# Altium PCB Design_Project.PcbDoc
Units mm, origin at the board's own origin, x right, y up, seen from the top; angles counter-clockwise.
Board outline 63.25 x 69.09 mm, 2 copper layers (Top Layer, Bottom Layer); 24 components, 25 nets, 124 pads, 5 vias.
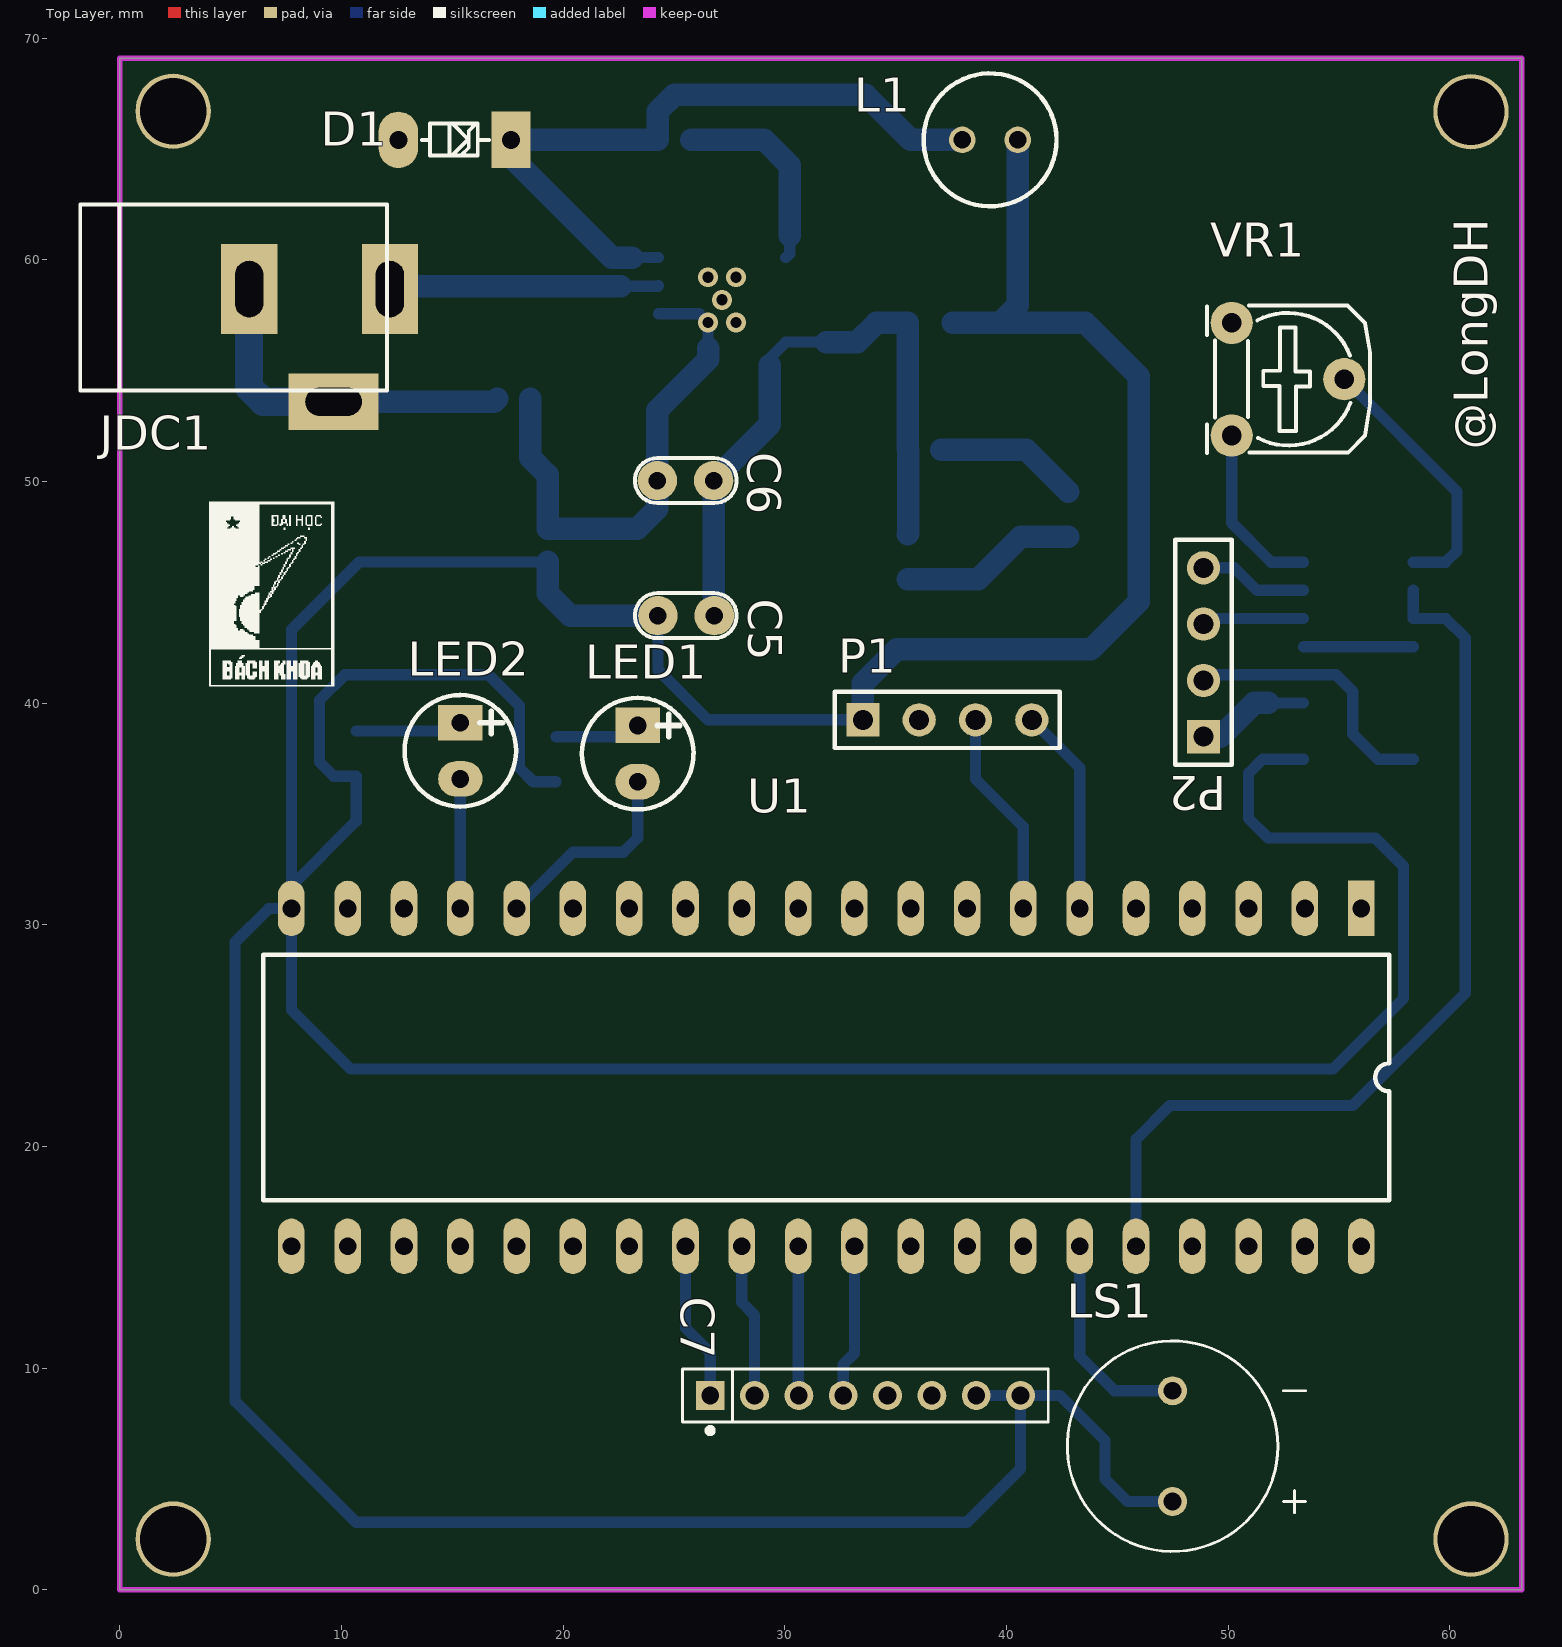
[diagram p0: Top Layer view]
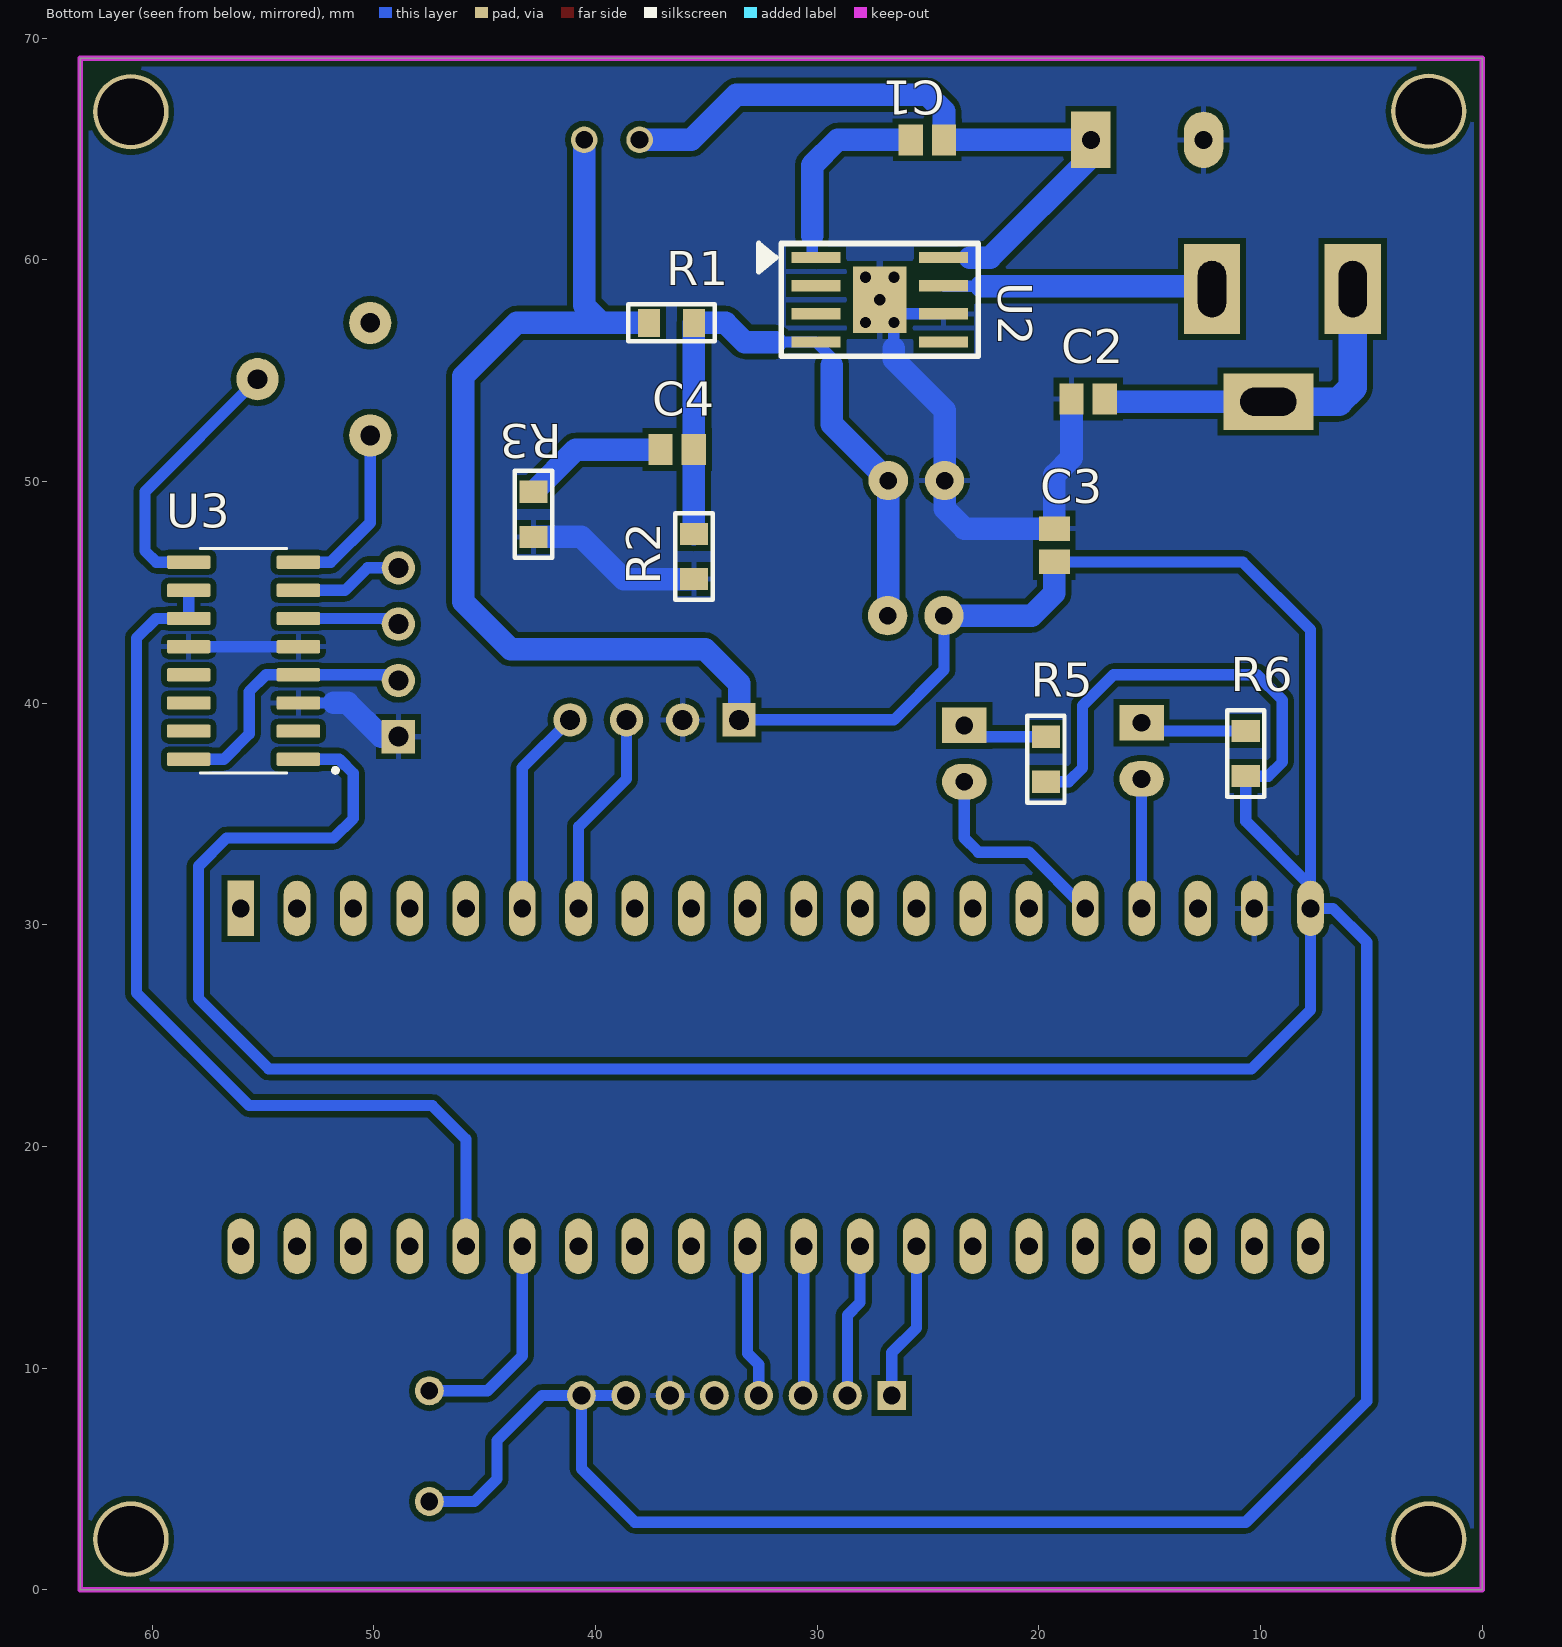
[diagram p1: Bottom Layer view, seen from below]
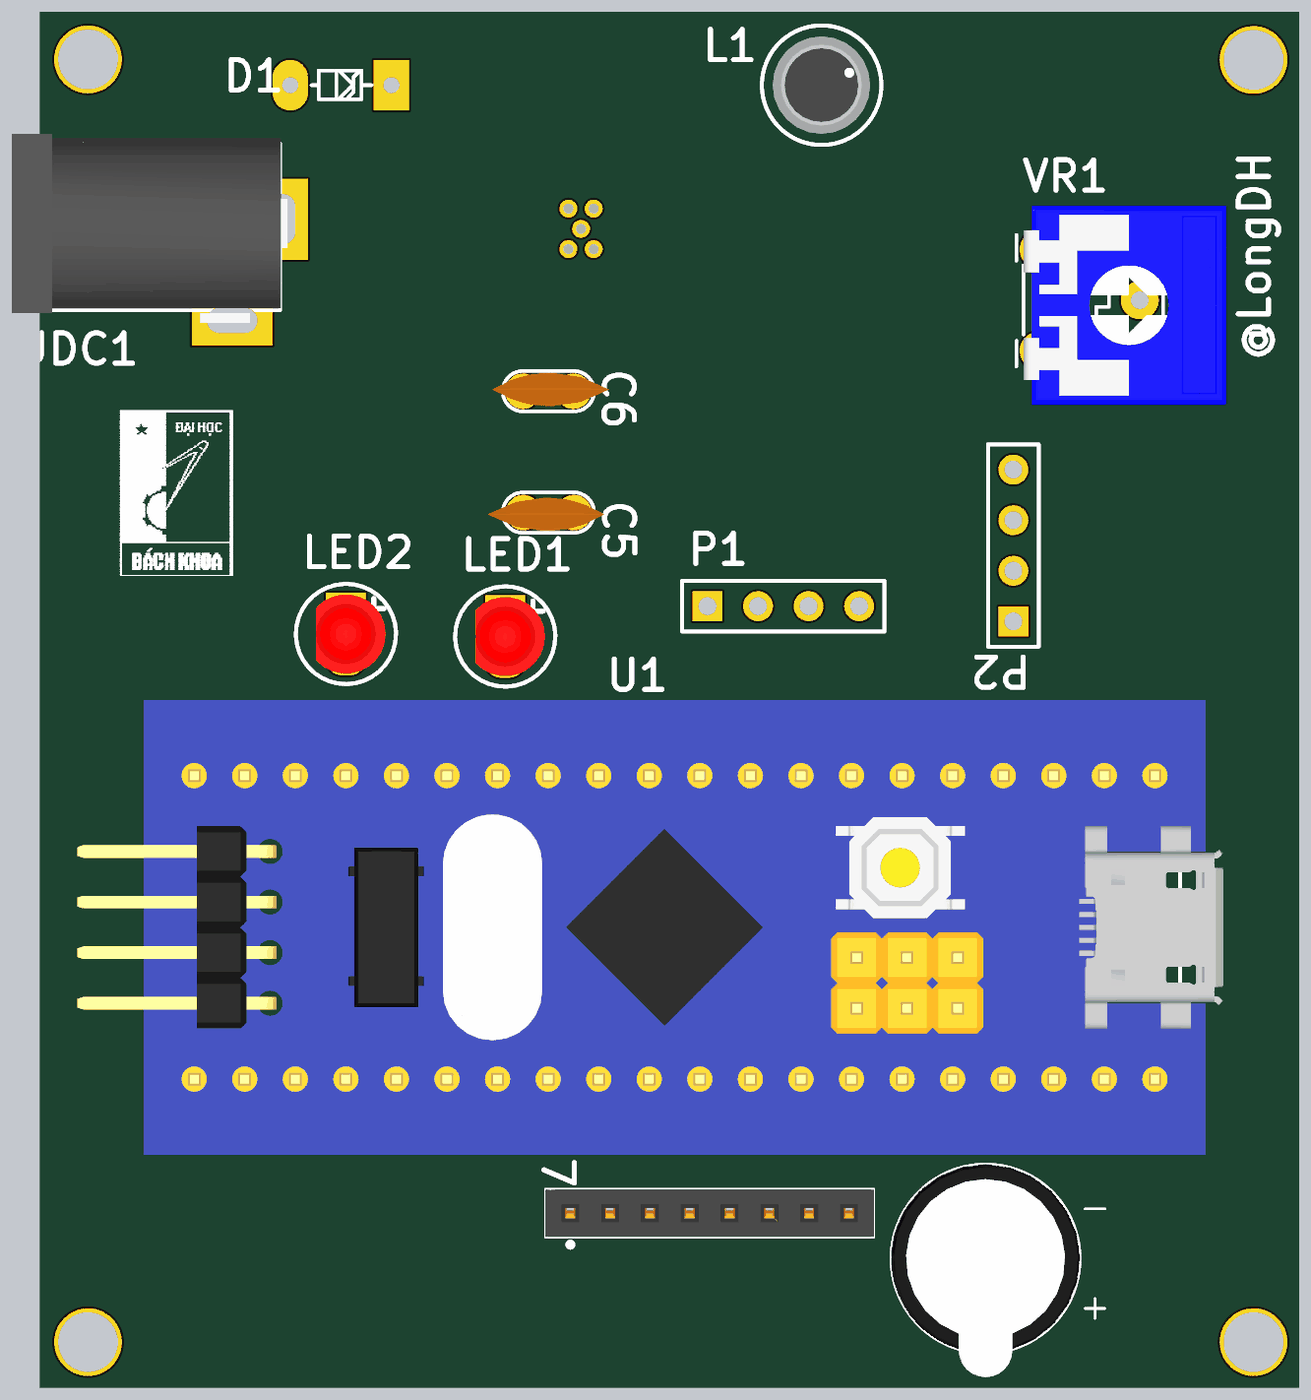
[diagram p2: 3D render of the assembled board from above, using the file's embedded part models]
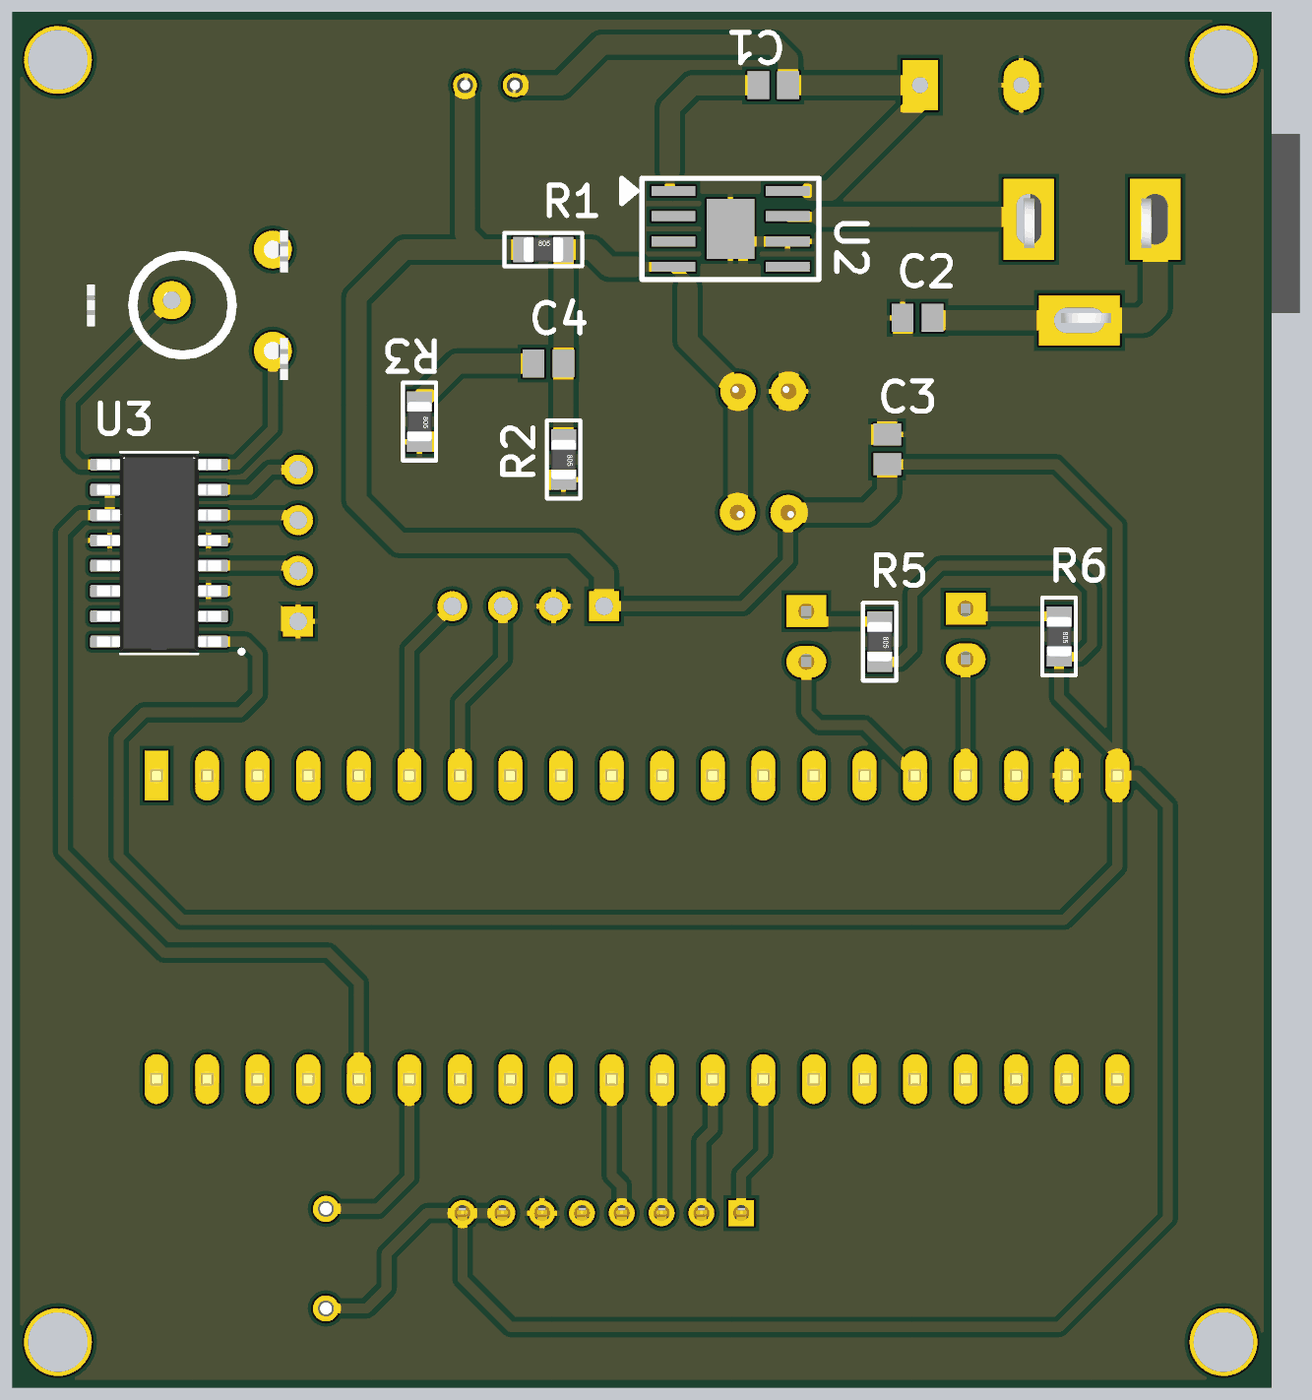
[diagram p3: 3D render of the assembled board from below, using the file's embedded part models]

## Layer stack, top to bottom
Top Solder: solder mask 0.0102, Solder Resist, Dk 3.5
Top Layer: signal copper 0.0356
Dielectric 1: dielectric 0.32, FR-4, Dk 4.8
Bottom Layer: signal copper 0.0356
Bottom Solder: solder mask 0.0102, Solder Resist, Dk 3.5

## Board outline
0,0 63.246,0 63.246,69.088 0,69.088

## Design rules (kind name [scope] priority, off if disabled: settings)
Clearance [All] p1: gap=0.254 ignorepadtopadclearanceinfootprint=FALSE except(0: Arc-Hole Track-Hole SMDPad-Hole THPad-Hole Via-Hole Fill-Hole Poly-Hole Region-Hole Text-Hole)
PolygonConnect [All] p1: connectstyle=Relief reliefconductorwidth=0.254 reliefentries=4 polygonreliefangle="90 Angle" airgapwidth=0.254
RoutingVias [All] p1: holewidth=0.711 width=1.27 viastyle="Through Hole" minholewidth=0.711 minwidth=1.27 maxholewidth=0.711 maxwidth=1.27
SolderMaskExpansion [All] p1: expansion=0.102
Width [All] p1: maxlimit=1.27 minlimit=0.508 preferedwidth=1.016
30 further rules are at their usual default settings.

## Classes and differential pairs
component class 05_ElectronicScales: P2 U3 VR1
component class 04_ComputerConnect: P1
component class 03_RFID: C7
component class 02_PowerSupply: C1 C2 C3 C4 C5 C6 D1 JDC1 L1 R1 R2 R3 U2
component class 01_MCU: LED1 LED2 LS1 R5 R6 U1

## Components (designator, comment, footprint, x,y, rotation, side; value= is the part's Value field where it differs from the comment)
C1 "0.01uF" C0805 25.031,65.405 r0 bottom value=33p
C2 "4.7uF" C0805 17.78,53.721 r180 bottom value=33p
C3 "Capacitor Ceramic" C0805 19.304,47.117 r270 bottom value=33p
C4 "Capacitor Ceramic" C0805 36.322,51.435 r180 bottom value=33p
C5 "1500pF" CN1 26.822,43.942 r180 top value=100pF
C6 "150pF" CN1 24.257,50.038 r0 top value=100pF
C7 "JP8x1-2.0" J8-C1T 33.639,8.763 r0 top
D1 "3V3" DZ0.5A 12.573,65.405 r180 top value=3v3
JDC1 "Jac DC" DC-IN 9.017,56.134 r0 top
L1 "15uH" L-DIP-M-5.3 39.263,65.405 r0 top value="150 mH"
LED1 "LED3" LED3mm 23.368,37.719 r270 top
LED2 "LED3" LED3mm 15.367,37.846 r270 top
LS1 "AI-1027-TWT-3V-R" XDCR_AI-1027-TWT-3V-R 47.498,6.477 r180 top
P1 "Header 4" HDR1X4 33.528,39.243 r0 top
P2 "Header 4" HDR1X4 48.895,38.481 r90 top
R1 "R0805" "DIEN TRO 0805" 36.576,57.15 r0 bottom value=10k
R2 "5.9k" "DIEN TRO 0805" 35.56,46.609 r90 bottom
R3 "R0805" "DIEN TRO 0805" 42.799,48.514 r90 bottom value=549
R5 "R0805" "DIEN TRO 0805" 19.685,37.465 r90 bottom value=0805
R6 "R0805" "DIEN TRO 0805" 10.668,37.719 r90 bottom value=0805
U1 "BluePill" "DIP40 - duplicate" 56.007,30.734 r270 top
U2 "TPS5430" TPS5430-2 27.178,58.191 r180 bottom
U3 "INA125UA" SOIC127P600X175-16N 55.88,41.91 r0 bottom
VR1 "10K" VR 50.165,57.15 r270 top value="VR 10K"

## Footprints (in the part's own frame and the unit in brackets; to place one, negate y for a bottom-side part, rotate by r counter-clockwise, add the part's x,y. Pads: shape width x height; smd on the part's side, far side on the other; paste and mask are expansions set on the pad)
C0805 [mm] "Chip Capacitor, Body 2.0x1.3mm, IPC High Density"
  rect 1.1x1.4 smd: 1(-0.75,0) 2(0.75,0)
  body extent -1.1,-0.72 1.1,0.72, height 1.4
CN1 [mil]
  round 70 hole 31: 1(0,0) 2(100,0)
  silkscreen extent -40,-40 141,40, body extent -60,-30 170,37, height 265
DC-IN [mil] "Jac DC input"
  rect 100x160 hole 50 slot 100 at 90 deg: 1(125,100) 2(-125,100)
  rect 160x100 hole 50 slot 100 at 0 deg: 3(25,-100)
  silkscreen extent -425,-80 120,250, body extent -410,-105 134,269, height 434
"DIEN TRO 0805" [mm] "Chip Resistor; Body 2.0 x 1.3 mm (LxW typ)"
  rect 1x1.27 smd: 1(-1.016,0) 2(1.016,0)
  silkscreen extent -1.96,-0.84 1.96,0.84, body extent -1,-0.62 1,0.63, height 0.78
"DIP40 - duplicate" [mm]
  rect 2.5x1.2 hole 0.8: 1(0,0)
  oval 2.5x1.2 hole 0.8: 2(0,-2.54) 3(0,-5.08) 4(0,-7.62) 5(0,-10.16) 6(0,-12.7) 7(0,-15.24) 8(0,-17.78) 9(0,-20.32) 10(0,-22.86) 11(0,-25.4) 12(0,-27.94) 13(0,-30.48) 14(0,-33.02) 15(0,-35.56) 16(0,-38.1) 17(0,-40.64) 18(0,-43.18) 19(0,-45.72) 20(0,-48.26) 21(15.24,-48.26) 22(15.24,-45.72) 23(15.24,-43.18) 24(15.24,-40.64) 25(15.24,-38.1) 26(15.24,-35.56) 27(15.24,-33.02) 28(15.24,-30.48) 29(15.24,-27.94) 30(15.24,-25.4) 31(15.24,-22.86) 32(15.24,-20.32) 33(15.24,-17.78) 34(15.24,-15.24) 35(15.24,-12.7) 36(15.24,-10.16) 37(15.24,-7.62) 38(15.24,-5.08) 39(15.24,-2.54) 40(15.24,0)
  silkscreen extent 2.08,-49.53 13.16,1.27, body extent -3.81,-54.13 19.05,3.43, height 4.5
DZ0.5A [mil] "Diode Zenner, W 80mil, L 300mil"
  oval 70x100 hole 32: 1(0,0)
  rect 70x100 hole 32: 2(-200,0)
  silkscreen extent -161,-29 -42,28
HDR1X4 [mm] "Connector; Header; 4 Position"
  rect 1.5x1.5 hole 0.9: 1(0,0)
  round 1.5 hole 0.9: 2(2.54,0) 3(5.08,0) 4(7.62,0)
  silkscreen extent -1.27,-1.27 8.89,1.27
J8-C1T [mm] "8p, 1 row, straight, gold plating"
  rect 1.3x1.3 hole 0.8: 1(-7,0)
  round 1.3 hole 0.8: 2(-5,0) 3(-3,0) 4(-1,0) 5(1,0) 6(3,0) 7(5,0) 8(7,0)
  silkscreen extent -8.25,-1.71 8.25,1.2, body extent -8.25,-1.2 8.25,1.2, height 4.31
L-DIP-M-5.3 [mm] "THT Inductor, 2-Leads, Body 5.3  mm"
  round 1.2 hole 0.8: 1(-1.25,0) 2(1.25,0)
  silkscreen extent -3,-3 3,3, body extent -2.44,-2.44 2.44,2.45, height 7.6
LED3mm [mm]
  rect 1.6x2 hole 0.8: 1(-1.27,0)
  oval 1.6x2 hole 0.8: 2(1.27,0)
  silkscreen extent -2.52,-2.51 2.51,2.52, body extent -1.99,-1.5 1.99,1.99, height 5.38
SOIC127P600X175-16N [mm]
  rrect25% 1.97x0.6 smd: 1(-2.475,4.445) 2(-2.475,3.175) 3(-2.475,1.905) 4(-2.475,0.635) 5(-2.475,-0.635) 6(-2.475,-1.905) 7(-2.475,-3.175) 8(-2.475,-4.445) 9(2.475,-4.445) 10(2.475,-3.175) 11(2.475,-1.905) 12(2.475,-0.635) 13(2.475,0.635) 14(2.475,1.905) 15(2.475,3.175) 16(2.475,4.445)
  silkscreen extent -4.24,-5.06 1.95,5.06, body extent -3.12,-4.99 3.12,4.99, height 1.58
TPS5430-2 [mil]
  rect 86.61x20 smd: 1(-113.19,75) 2(-113.19,25) 3(-113.19,-25) 4(-113.19,-75) 5(113.19,-75) 6(113.19,-25) 7(113.19,25) 8(113.19,75)
  rect 95x100 smd: 9(0,-9) 9(0,9)
  silkscreen extent -215,-100 175,100, body extent -131,-98 131,98, height 67
VR [mil] "Resistor Variable"
  round 75 hole 35: 1(0,0) 2(100,200) 3(200,0)
  silkscreen extent -31,-44 231,246, body extent -87,-30 307,372, height 165
XDCR_AI-1027-TWT-3V-R [mm]
  round 1.308 hole 0.8: N(0,-2.5) P(0,2.5)
  silkscreen extent -6,-4.75 4.75,4.75, body extent -4.75,-4.75 4.75,5.95, height 5.05

## Part data
C1 C2 C3 C4: library part CapSMD, "Capacitor", LatestRevisionDate=17-Jul-2002, LatestRevisionNote="Re-released for DXP Platform.", PackageReference=RAD-0.3, Published=8-Jun-2000, Publisher="Altium Limited"
C5 C6: library part CN1, "Cap np  1pF - 472pF"
C7: "WR-PHD 2.00 mm Socket Header", Manufacturer="Würth Elektronik eiSos GmbH", partNo=62000811821, ComponentLink1 Description=Manufacturer, ComponentLink1URL=http://www.we-online.com, ComponentLink2 Description=Datasheet, ComponentLink2URL=http://katalog.we-online.de/em/datasheet/6200xx11821.pdf, Created by="Karrer Zheng", Created Date="2 April 2013", NoPins=08
D1: library part DZ, "Diode Zenner"
JDC1: library part DCIN, "Jac DC input"
L1: library part L-DIP-1, "Inductor"
LED1 LED2: library part "LED 3mm", "LED 3mm"
LS1: "Buzzers Indicator, Internally Driven Electromechanical/Magnetic 3V 30mA 2.7kHz 80dB @ 3V, 10cm Through Hole PC Pins", Package=None, Availability="In Stock", Check_prices=https://www.snapeda.com/parts/AI-1027-TWT-3V-R/PUI%20Audio,%20Inc./view-part/7376009/?ref=eda, MF="PUI Audio, Inc.", MP=AI-1027-TWT-3V-R, Price=None, Purchase-URL=https://pricing.snapeda.com/search/part/AI-1027-TWT-3V-R/?ref=eda, SnapEDA_Link=https://www.snapeda.com/parts/AI-1027-TWT-3V-R/PUI%20Audio,%20Inc./view-part/7376009/?ref=snap
P1 P2: "Header, 4-Pin", LatestRevisionDate=17-Jul-2002, LatestRevisionNote="Re-released for DXP Platform.", Publisher="Altium Limited"
R1 R3 R5 R6: "Resistor SMD 0805", LatestRevisionDate=17-Jul-2002, LatestRevisionNote="Re-released for DXP Platform.", PackageReference=AXIAL-0.4, Published=8-Jun-2000, Publisher="Altium Limited"
R2: library part R0805, "Resistor SMD 0805", LatestRevisionDate=17-Jul-2002, LatestRevisionNote="Re-released for DXP Platform.", PackageReference=AXIAL-0.4, Published=8-Jun-2000, Publisher="Altium Limited"
U3: "Instrumentation Amplifier with Precision Voltage Reference 16-SOIC", Package=None, Availability=Unavailable, MP=INA125UA, Price=None
VR1: library part VR1, "Var Resistor"
U2: Name=TPS5430

## Free pads (board coordinates)
  round 3.4 hole 3: 3(2.413,66.699) 4(60.96,66.675) 5(60.96,2.286) 6(2.413,2.286)

## Via types
v1: diameter 0.9, hole 0.5, Top Layer to Bottom Layer, 5 vias

## Nets (pads, with @x,y where several pads share a name; then routed paths per layer and width w, separated by ;. In a path a pad name is that pad's centre, name@x,y a point inside that pad or via, vN(x,y) a via of type N, cw(c..) or ccw(c..) an arc to the next point about the centre after c; other vN are vias at no path point)
3.3V: C3.2 C5.2 C7.7 C7.8 L1.2 LS1.P P1.1 R1.2 R5.1 R6.1 U1.20 U3.1 | length 267.7
  Bottom Layer w0.508: C3.2 10.807,46.367 7.747,43.307 U1.20@7.747,31.75 ; R5.1 18.657,36.449 18.034,37.072 18.034,39.878 16.637,41.275 10.16,41.275 9.017,40.132 9.017,37.338 9.652,36.703 R6.1 10.668,34.671 U1.20@7.747,31.75 ; C5.2 24.282,41.504 26.543,39.243 P1.1 ; C7.7 C7.8 ; LS1.P 45.466,3.977 44.45,4.993 44.45,6.731 42.418,8.763 C7.8 ; U3.1 51.562,37.465 50.927,36.83 50.927,34.798 51.816,33.909 56.642,33.909 57.912,32.639 57.912,26.67 54.737,23.495 10.414,23.495 7.747,26.162 U1.20 ; U1.20 6.731,30.734 5.207,29.21 5.207,8.509 10.668,3.048 38.227,3.048 40.639,5.46 C7.8 ; U1.20 U1.20@7.747,31.75
  Bottom Layer w1.016: C3.2 19.304,44.958 20.32,43.942 C5.2 ; P1.1 33.528,40.894 35.052,42.418 43.815,42.418 45.974,44.577 45.974,54.737 43.561,57.15 39.726,57.15 ; R1.2 39.726,57.15 ; L1.2 40.513,57.937 39.726,57.15
GND: C2.1 C3.1 C6.1 C7.6 D1.1 P1.2 P2.1 R2.1 R3.1 U1.19 U2.6 U2.9 U3.3 U3.5 U3.12 | length 41.4
  Bottom Layer w0.508: U2.6 26.162,57.556 v1(26.543,57.175) 26.543,56.007 ; 51.816,40.005 U3.3 ; U3.5 U3.12
  Bottom Layer w1.016: C2.1 18.53,51.066 19.304,50.292 C3.1 23.356,47.867 24.257,48.768 C6.1 24.257,53.213 26.543,55.499 26.543,56.007 ; R2.1 38.735,45.593 40.64,47.498 R3.1 ; P2.1 49.657,38.481 51.181,40.005 51.816,40.005
  other v1: 27.813,57.175 27.178,58.191 26.543,59.207 27.813,59.207
NetC1_1: C1.1 D1.2 L1.1 U2.8 | length 32.1
  Bottom Layer w0.508: 23.114,60.096 U2.8
  Bottom Layer w1.016: 23.114,60.096 22.2,60.096 17.653,64.643 D1.2 C1.1 24.281,66.699 25.019,67.437 33.655,67.437 35.687,65.405 L1.1
NetC1_2: C1.2 U2.1 | length 9.2
  Bottom Layer w0.508: U2.1 30.226,60.269 30.226,61.087
  Bottom Layer w1.016: C1.2 29.083,65.405 30.226,64.262 30.226,61.087
NetC2_2: C2.2 JDC1.2 JDC1.3 | length 15.9
  Bottom Layer w1.016: JDC1.3 16.903,53.594 C2.2
  Bottom Layer w1.27: JDC1.2 5.842,54.229 6.477,53.594 JDC1.3
NetC4_1: C4.1 R3.2 | length 6.5
  Bottom Layer w1.016: C4.1 40.894,51.435 R3.2
NetC4_2: C4.2 C5.1 C6.2 R1.1 R2.2 U2.4 | length 29.1
  Bottom Layer w0.508: 29.337,55.245 29.337,55.57 U2.4 31.877,56.286
  Bottom Layer w1.016: C5.1 26.797,43.967 C6.2 29.337,52.578 29.337,55.245 ; 31.877,56.286 33.274,56.286 34.138,57.15 R1.1 35.56,51.447 C4.2 35.572,47.637 R2.2
NetC7_1: C7.1 U1.28 | length 7.2
  Bottom Layer w0.508: U1.28 25.527,11.811 26.639,10.699 C7.1
NetC7_2: C7.2 U1.29 | length 7.4
  Bottom Layer w0.508: U1.29@28.386,15.175 U1.29 28.067,12.954 28.639,12.382 C7.2
NetC7_3: C7.3 U1.30 | length 6.7
  Bottom Layer w0.508: U1.30 30.607,8.795 C7.3
NetC7_4: C7.4 U1.31 | length 6.9
  Bottom Layer w0.508: C7.4 32.639,10.16 33.147,10.668 U1.31
NetJDC1_1: JDC1.1 U2.7 | length 12.2
  Bottom Layer w0.508: 22.606,58.801 24.278,58.801 U2.7
  Bottom Layer w1.016: JDC1.1 12.319,58.801 22.606,58.801
NetLED1_1: LED1.1 R5.2 | length 3.9
  Bottom Layer w0.508: R5.2 22.86,38.481 LED1.1
NetLED1_2: LED1.2 U1.16 | length 9.3
  Bottom Layer w0.508: U1.16 20.447,33.274 22.733,33.274 23.368,33.909 LED1.2
NetLED2_1: LED2.1 R6.2 | length 4.9
  Bottom Layer w0.508: R6.2 14.986,38.735 LED2.1
NetLED2_2: LED2.2 U1.17 | length 5.8
  Bottom Layer w0.508: U1.17 LED2.2
NetLS1_N: LS1.N U1.35 | length 9.8
  Bottom Layer w0.508: U1.35 43.307,10.541 44.871,8.977 LS1.N
NetP1_3: P1.3 U1.7 | length 9.4
  Bottom Layer w0.508: P1.3 38.608,36.576 40.767,34.417 U1.7
NetP1_4: P1.4 U1.6 | length 9.4
  Bottom Layer w0.508: P1.4 43.307,37.084 U1.6
NetU1_36: U1.36 U3.10 U3.11 | length 42.4
  Bottom Layer w0.508: U1.36 45.847,20.32 47.371,21.844 55.626,21.844 60.706,26.924 60.706,42.926 59.817,43.815 U3.11 U3.10
NetU3_8: U3.8 VR1.3 | length 7.9
  Bottom Layer w0.508: VR1.3 50.165,48.133 51.943,46.355 U3.8
NetU3_9: U3.9 VR1.2 | length 12
  Bottom Layer w0.508: VR1.2 60.325,49.53 60.325,46.863 59.817,46.355 U3.9
VIN+: P2.3 U3.6 | length 4.6
  Bottom Layer w0.508: P2.3 49.149,43.815 U3.6
VIN-: P2.4 U3.7 | length 4.9
  Bottom Layer w0.508: P2.4 50.292,46.101 51.308,45.085 U3.7
VREFOUT: P2.2 U3.4 U3.16 | length 12.3
  Bottom Layer w0.508: P2.2 49.149,41.275 U3.4 54.864,41.275 55.626,40.513 55.626,38.608 56.769,37.465 U3.16
pads on no net: C7.5 U1.1 U1.2 U1.3 U1.4 U1.5 U1.8 U1.9 U1.10 U1.11 U1.12 U1.13 U1.14 U1.15 U1.18 U1.21 U1.22 U1.23 U1.24 U1.25 U1.26 U1.27 U1.32 U1.33 U1.34 U1.37 U1.38 U1.39 U1.40 U2.2 U2.3 U2.5 U3.2 U3.13 U3.14 U3.15 VR1.1

## Polygon pours and split planes (outlines as drawn)
no net on Top Layer "Top Layer-No Net" (solid, pour order 4): 0.127,68.961
GND on Bottom Layer (solid, pour order 16): 0,0 63.246,0 63.246,69.088 0,69.088
no net on Bottom Layer (solid, pour order 14): 63.246,0

## Keep-outs
Keep-Out Layer:
  the board outline again, w0.254

## Silkscreen, mask and mechanical layers (free items; w line width, h text height)
Top Overlay:
  drawing of 697 lines, arcs and shapes, not listed
  text "@LongDH" at 61.722,51.435 h1.52 r90